# Altium PCB SENSEI_Base-Board_Clean.PcbDoc (part 6 of 7)
Units mm, origin at the board's own origin, x right, y up, seen from the top; angles counter-clockwise.
Board outline 25.2 x 15.15 mm, 8 copper layers (Top Sig/Pwr, GND1, Sig1, GND2, Sig2, Pwr, GND3, Bot Sig/Pwr), stack 1.53 mm thick; 187 components, 192 nets, 951 pads, 1831 vias.
Unrouted connection lines stored in the file: 214.
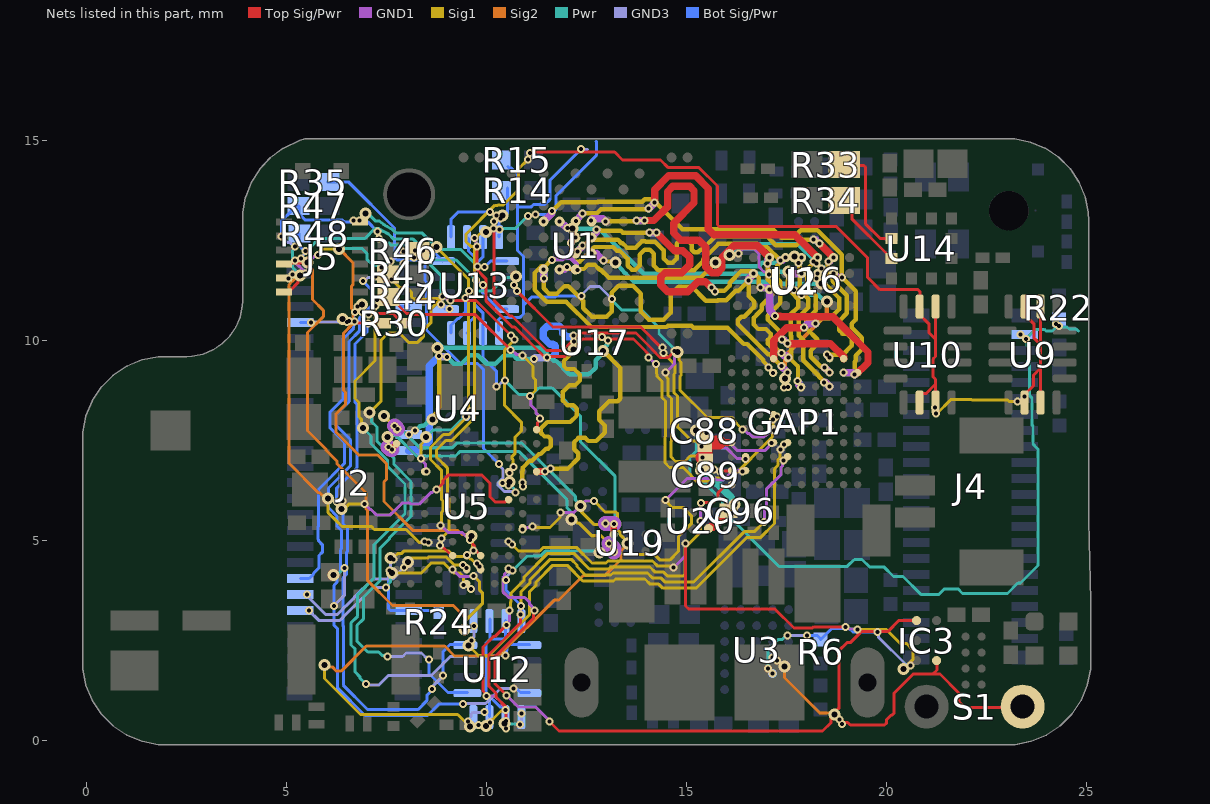
[diagram p11: the nets of this part, all layers, seen from the top]

## Via types
v1: diameter 0.2, hole 0.1, Top Sig/Pwr to GND1, 467 vias
v2: diameter 0.2, hole 0.1, GND3 to Bot Sig/Pwr, 431 vias
v3: diameter 0.2, hole 0.1, GND1 to Sig1, 369 vias
v4: diameter 0.3, hole 0.15, Sig1 to Pwr, 279 vias
v5: diameter 0.2, hole 0.1, Pwr to GND3, 270 vias
v6: diameter 0.3, hole 0.15, Top Sig/Pwr to Bot Sig/Pwr, tented both sides, 15 vias

## Nets (pads, with @x,y where several pads share a name; then routed paths per layer and width w, separated by ;. In a path a pad name is that pad's centre, name@x,y a point inside that pad or via, vN(x,y) a via of type N, cw(c..) or ccw(c..) an arc to the next point about the centre after c; other vN are vias at no path point) (continued)
nRF_QSPI_IO2: J2.16 U5.L9 U17.B2 | length 13.1
  Top Sig/Pwr w0.185: U5.L9@11.25,6.725 11.251,6.726 v1(11.456,6.727) v1(11.456,6.727)
  GND1 w0.111: v1(11.456,6.727) 11.48,6.727 11.536,6.784 11.581,6.784 v3(11.598,6.801)
  GND3 w0.111: v2(8.054,7.655) 8.078,7.655 8.159,7.736 8.187,7.736 v5(8.204,7.753) ; v2(12.881,10.094) 12.899,10.077 12.929,10.077 13.006,10 v5(13.03,10)
  Sig1 w0.111: v4(8.643,8.031) 8.643,8.082 8.767,8.206 8.767,8.267 8.819,8.32 8.819,9.717 8.771,9.766 v4(8.771,9.817) ; v3@11.604,6.801 12.034,6.801 12.294,7.061 12.294,7.185 12.193,7.287 12.193,7.463 12.296,7.567 12.467,7.567 12.544,7.49 12.744,7.49 12.953,7.699 12.953,7.877 12.815,8.016 12.815,8.237 13.06,8.483 13.28,8.483 13.343,8.545 13.343,9.314 v4(12.913,9.744)
  Pwr w0.111: v5(8.204,7.753) 8.229,7.753 8.334,7.858 8.359,7.858 8.367,7.866 8.428,7.866 8.592,8.031 v4(8.643,8.031) ; v4@8.758,9.825 10.555,9.825 10.561,9.819 11.351,9.819 11.681,9.489 11.739,9.489 12.069,9.159 12.552,9.159 12.573,9.18 12.582,9.18 12.725,9.323 12.725,9.505 12.913,9.693 v4(12.913,9.744) 12.913,9.795 13.013,9.895 13.013,9.983 v5(13.03,10)
  Bot Sig/Pwr w0.185: v2(8.054,7.655) 8.054,7.651 J2.16@8.055,7.65
nRF_QSPI_IO3: J2.15 U5.K8 U17.B4 | length 13.9
  GND1 w0.111: v1@10.901,6.377 10.903,6.379 v1@10.903,6.446 ; v1(10.915,6.349) 10.903,6.361 v1@10.903,6.446 ; v1@10.903,6.446 v3(10.892,6.458) v1@10.903,6.446
  GND3 w0.111: v2(12.172,10.123) 12.177,10.118 12.177,9.976 v5(12.182,9.971)
  GND3 w0.185: v2(8.815,9.618) 8.819,9.618 8.839,9.598 9.005,9.598 v5(9.008,9.595) ; v5(11.181,9.545) 11.185,9.545 11.211,9.57 11.509,9.57 v2(11.512,9.573)
  Sig1 w0.111: v3(10.892,6.458) 10.892,6.728 10.908,6.745 10.908,6.826 11.075,6.993 11.135,6.993 11.307,7.165 11.356,7.165 11.491,7.3 11.544,7.3 11.605,7.361 11.605,7.538 11.54,7.602 11.447,7.602 11.355,7.694 11.355,7.8 11.518,7.964 12.091,7.964 12.257,8.13 12.257,8.296 12.165,8.388 12.019,8.388 11.907,8.5 11.907,8.719 12.068,8.88 12.21,8.88 12.332,9.002 12.332,9.143 12.187,9.289 11.999,9.289 11.934,9.354 11.934,9.496 12.166,9.728 v4(12.166,9.779)
  Pwr w0.111: v5(9.008,9.595) 9.181,9.422 9.373,9.422 9.584,9.633 9.777,9.633 9.988,9.422 10.22,9.422 10.425,9.627 10.673,9.627 10.755,9.545 v5(11.181,9.545) ; v4@12.13,9.816 v4(12.166,9.779) 12.174,9.787 12.174,9.964 v5(12.182,9.971)
  Bot Sig/Pwr w0.185: J2.15@8.055,7.25 8.073,7.268 8.293,7.268 8.398,7.373 8.454,7.373 8.563,7.482 8.563,9.363 8.815,9.614 v2(8.815,9.618) ; v2(11.512,9.573) 11.515,9.576 11.635,9.576 11.72,9.661 11.72,9.861 11.7,9.88 ; 11.662,9.897 11.655,9.904 11.586,9.904 11.412,10.077 11.412,10.254 11.52,10.362 11.818,10.362 11.903,10.277 11.903,10.184 11.99,10.097 12.146,10.097 v2(12.172,10.123)
nRF_RAM_pwr_sel: U4.B2 U5.C9 | length 2.6
  Top Sig/Pwr w0.075: U5.C9@8.45,6.725 8.451,6.726 v1(8.493,6.726)
  GND1 w0.075: v3(8.362,7.053) 8.362,7.019 8.469,6.912 8.469,6.75 v1(8.493,6.726)
  GND3 w0.075: v2(9.487,8.103) 9.487,8.115 9.597,8.225 v5(9.597,8.236)
  Sig1 w0.075: v3(8.362,7.053) 8.362,7.404 8.483,7.525 v4(8.483,7.586)
  Pwr w0.075: v4(8.483,7.586) 8.49,7.586 8.672,7.769 9.13,7.769 v5(9.597,8.236)
OSPI_0: GAP1.J10 U1.H7 U2.D5 | length 11.8
  Top Sig/Pwr w0.185: v1(17.525,9.925) 18.597,9.925 18.925,9.597 GAP1.J10@18.925,9.55
  GND1 w0.185: v3(12.106,12.445) 12.109,12.448 12.109,12.468 12.219,12.578 v1(12.219,12.582) ; v3(17.342,12.008) 17.342,12.001 17.397,12.001 17.471,12.075 v1(17.475,12.075) ; v3(17.381,10.025) 17.384,10.022 17.424,10.022 17.521,9.925 v1(17.525,9.925)
  Sig1 w0.111: v3(12.106,12.445) 12.111,12.44 12.111,12.064 12.201,11.975 12.326,11.975 12.69,12.339 13.161,12.339 13.25,12.25 13.321,12.25 13.53,12.041 13.53,11.87 13.625,11.775 13.725,11.775 13.825,11.875 13.825,12.15 13.95,12.275 14.075,12.275 14.175,12.175 14.175,11.875 14.289,11.761 15.186,11.761 15.412,11.987 15.412,12.033 15.795,12.417 16.77,12.417 16.848,12.339 17.011,12.339 v3(17.342,12.008) ; v3@17.319,11.987 17.336,11.97 17.336,11.945 17.27,11.879 17.27,11.544 17.345,11.468 17.345,10.945 17.025,10.625 17.025,10.525 17.375,10.175 17.375,10.03 v3(17.381,10.025)
OSPI_1: GAP1.H8 U1.G5 U2.D4 | length 10.4
  GND1 w0.185: v1(11.825,11.775) 11.828,11.778 11.948,11.778 12.004,11.835 v3(12.008,11.835) ; v3(17.803,11.94) 17.806,11.943 17.806,12.002 17.875,12.071 v1(17.875,12.075) ; v3(18.433,8.957) 18.436,8.954 18.467,8.954 18.571,8.85 v1(18.575,8.85)
  Sig1 w0.111: v3(12.008,11.835) 12.033,11.835 12.078,11.789 12.433,11.789 12.543,11.9 12.699,11.9 12.829,11.77 12.857,11.77 13.052,11.575 15.35,11.575 v4(15.725,11.95) ; v4(17.7,12.104) 17.7,12.067 17.803,11.965 v3(17.803,11.94) 17.82,11.923 17.82,11.851 17.83,11.841 17.83,11.257 18.039,11.048 18.039,10.827 17.8,10.588 17.8,10.125 17.925,10 17.925,9.838 17.914,9.827 17.914,9.512 18.305,9.12 18.305,9.109 18.433,8.981 v3(18.433,8.957)
  Pwr w0.111: v4(15.725,11.95) 15.761,11.914 15.901,11.914 15.959,11.856 16.802,11.856 16.896,11.95 17.333,11.95 17.455,12.072 17.669,12.072 v4(17.7,12.104)
OSPI_2: GAP1.H9 U1.H8 U2.D3 | length 11.7
  Top Sig/Pwr w0.185: v1(14.2,13.45) 14.203,13.453 14.203,13.772 14.548,14.117 15.227,14.117 15.543,13.801 15.543,12.782 15.675,12.65 17.7,12.65 v1(18.275,12.075)
  GND1 w0.185: v1(12.233,12.984) v3(12.391,13.182) ; v3(14.05,13.3) v1(14.2,13.45) ; v3(18.175,11.975) v1(18.275,12.075) ; v3(18.45,9.325) 18.452,9.325 18.575,9.203 v1(18.576,9.203)
  Sig1 w0.111: v3(12.391,13.182) 12.757,13.182 12.859,13.284 14.034,13.284 v3(14.05,13.3) ; v3(18.175,11.975) 18.175,11.951 18.016,11.792 18.016,11.334 18.225,11.125 18.225,10.75 17.995,10.52 17.995,10.305 18.268,10.031 18.268,9.918 18.1,9.75 18.1,9.595 18.353,9.342 18.433,9.342 v3(18.45,9.325)
OSPI_3: GAP1.H10 U1.H6 U2.D2 | length 11.8
  Top Sig/Pwr w0.185: U1.H6@12.225,12.175 12.225,12.179 v1(12.271,12.225) ; v1(18.325,12.425) v1(18.675,12.075)
  GND1 w0.185: v1(12.271,12.225) 12.271,12.229 12.397,12.355 12.397,12.372 v3(12.4,12.375) ; v3(18.175,12.525) 18.178,12.522 18.224,12.522 18.321,12.425 v1(18.325,12.425) ; v3@18.506,9.643 18.506,9.641 18.572,9.574 v1(18.572,9.572) ; v3(18.55,11.975) 18.553,11.978 18.574,11.978 18.671,12.075 v1(18.675,12.075)
  Sig1 w0.111: v3(12.4,12.375) 12.424,12.375 12.574,12.525 13.275,12.525 13.364,12.436 13.398,12.436 13.508,12.325 13.725,12.325 13.879,12.479 13.97,12.479 13.98,12.47 14.21,12.47 14.425,12.255 14.425,12.05 14.525,11.95 14.65,11.95 14.75,12.05 14.75,12.425 14.85,12.525 15,12.525 15.125,12.4 15.125,12.271 15.19,12.207 15.282,12.207 15.35,12.275 15.387,12.275 15.715,12.603 17.01,12.603 17.229,12.384 17.744,12.384 17.886,12.525 v3(18.175,12.525) ; v3@18.506,9.643 18.511,9.648 18.902,9.648 19.124,9.87 19.124,10.054 19.003,10.175 18.895,10.175 18.81,10.26 18.81,10.485 19.005,10.68 19.005,11.133 18.655,11.482 18.655,11.541 18.533,11.663 18.533,11.958 v3(18.55,11.975)
  other v3: 18.505,9.65
OSPI_4: GAP1.E10 U1.J8 U2.D6 | length 11.6
  Top Sig/Pwr w0.185: v1(13.95,13) 13.953,13.003 14.178,13.003 14.525,13.35 14.525,13.727 14.656,13.857 15.078,13.857 15.186,13.749 15.186,13.444 14.679,12.937 14.679,12.691 14.86,12.51 15.305,12.51 15.475,12.34 15.475,11.842 15.625,11.692 15.778,11.692 15.886,11.801 15.886,12.085 16.176,12.375 16.775,12.375 v1(17.075,12.075)
  GND1 w0.185: v1(12.604,13.008) 12.608,13.008 12.643,13.042 12.904,13.042 12.971,12.975 v3(12.975,12.975) ; v3(13.75,13) v1(13.95,13) ; v3(17.026,11.926) 17.028,11.928 17.028,12.024 17.075,12.071 v1(17.075,12.075) ; v3(17.369,9.694) 17.373,9.694 17.443,9.625 17.495,9.625 17.542,9.578 v1(17.546,9.578)
  Sig1 w0.111: v3(12.975,12.975) 12.988,12.988 13.738,12.988 v3(13.75,13) ; v3(17.026,11.926) 17.025,11.526 17.16,11.391 17.16,11.166 16.875,10.881 16.875,10.77 16.791,10.686 16.791,10.682 16.675,10.566 16.675,10.401 16.787,10.29 16.985,10.29 17.1,10.175 17.1,10.083 17.033,10.016 17.033,9.925 17.111,9.846 17.193,9.846 17.345,9.694 v3(17.369,9.694)
OSPI_5: GAP1.E9 U1.F5 U2.C7 | length 11.7
  GND1 w0.185: v1(11.425,11.775) 11.427,11.773 11.427,11.552 v3(11.429,11.55) ; v3(16.55,11.5) 16.553,11.503 16.553,11.549 16.675,11.671 v1(16.675,11.675) ; v3(17.368,9.363) 17.368,9.36 17.525,9.203 v1(17.525,9.2)
  Sig1 w0.111: v3(11.429,11.55) 11.425,11.546 11.425,11.306 11.556,11.175 11.76,11.175 11.948,11.364 12.04,11.364 12.414,10.99 12.414,10.811 12.625,10.6 13,10.6 13.125,10.725 13.125,11.2 13.3,11.375 13.65,11.375 13.85,11.175 13.85,10.725 14.05,10.525 14.425,10.525 14.6,10.7 14.6,11.15 14.8,11.35 15.125,11.35 15.48,10.995 15.772,10.995 15.784,11.007 15.988,11.007 16.227,11.245 16.295,11.245 v3(16.55,11.5) ; v3@16.55,11.494 16.55,11.114 16.689,10.975 16.689,10.847 16.605,10.763 16.605,10.759 16.441,10.595 16.364,10.595 16.278,10.509 16.278,10.417 17.034,9.661 17.071,9.661 v3(17.368,9.363)
OSPI_6: GAP1.F8 U1.G8 U2.C4 | length 9.8
  GND1 w0.185: v1(11.825,12.975) v3(12.017,12.814) ; v3(17.586,11.573) 17.586,11.575 17.583,11.578 17.676,11.672 17.872,11.672 v1(17.875,11.675) ; v3(17.778,8.985) 17.778,8.981 17.8,8.959 17.8,8.891 17.856,8.835 v1(17.856,8.831)
  Sig1 w0.111: v3(12.017,12.814) v4(12.15,12.8) ; v4(17.55,11.725) 17.564,11.711 17.564,11.593 17.579,11.578 17.579,11.554 17.531,11.507 17.531,11.349 17.623,11.257 17.623,11.202 17.788,11.036 17.788,10.839 17.605,10.656 17.605,10.126 17.611,10.12 17.611,9.527 17.785,9.353 17.785,8.993 v3(17.778,8.985) ; v3@17.579,11.573 v3(17.586,11.573)
  Pwr w0.111: v4(12.15,12.8) 12.8,12.8 13.93,11.67 16.985,11.67 17.04,11.725 v4(17.55,11.725)
OSPI_7: GAP1.D10 U1.J6 U2.C3 | length 9.6
  Top Sig/Pwr w0.185: GAP1.D10@17.175,9.55 17.175,10 17.5,10.325 v1(17.932,10.325)
  GND1 w0.185: v1(12.625,12.175) 12.628,12.172 12.749,12.172 12.921,12 v3(12.925,12) ; v1(17.932,10.325) 17.937,10.325 18.032,10.421 18.222,10.421 v3(18.225,10.424) ; v3@18.248,11.55 v3(18.246,11.55) 18.246,11.554 18.272,11.58 18.272,11.672 v1(18.275,11.675)
  Sig1 w0.111: v3(12.925,12) v4(13.223,11.951) ; v3(18.225,10.424) 18.249,10.424 18.376,10.552 18.577,10.552 18.811,10.786 18.811,11.064 18.513,11.362 18.438,11.362 v4(18.375,11.425) 18.25,11.55 v3(18.246,11.55)
  Pwr w0.111: v4(13.223,11.951) 13.47,11.68 ccw(c13.552,11.755) 13.473,11.677 13.474,11.676 13.675,11.475 17.3,11.475 17.35,11.425 v4(18.375,11.425)
OSPI_CLK: GAP1.K9 U1.J7 U2.B6 | length 11.7
  Top Sig/Pwr w0.185: v1(14.248,12.698) 14.697,12.25 14.908,12.25 15.075,12.083 15.075,11.9 14.875,11.7 14.463,11.7 14.355,11.592 14.355,11.395 14.525,11.225 15.025,11.225 15.275,11.475 15.471,11.475 15.621,11.325 v1(15.625,11.325) ; v1(17.208,10.617) 17.211,10.614 17.336,10.614 17.358,10.593 18.657,10.593 19.535,9.715 19.535,9.442 19.383,9.29 19.365,9.29 GAP1.K9@19.275,9.2
  GND1 w0.185: v1(12.625,12.575) 12.625,12.579 12.747,12.701 12.747,12.772 v3(12.75,12.775) ; v3@14.076,12.699 v1(14.248,12.698) ; v1(15.625,11.325) 15.625,11.321 15.707,11.239 15.707,11.228 v3(15.71,11.225) ; v3(16.85,11.325) 16.853,11.322 17.024,11.322 17.071,11.275 v1(17.075,11.275) 17.075,10.754 17.208,10.621 v1(17.208,10.617)
  Sig1 w0.111: v3(12.75,12.775) 12.767,12.758 12.866,12.758 12.88,12.745 13.355,12.745 13.4,12.7 v3(14.075,12.7) ; v3(15.71,11.225) 15.727,11.242 15.942,11.242 16.075,11.375 16.075,11.445 16.36,11.73 16.645,11.73 16.8,11.576 16.8,11.399 16.85,11.349 v3(16.85,11.325)
OSPI_CS0: GAP1.D9 U1.H5 | length 8.8
  GND1 w0.107: v3(11.641,12.014) 11.659,12.032 11.882,12.032 11.886,12.035 11.899,12.035 11.927,12.063 12.103,12.063 12.255,11.911 12.255,11.777 v1(12.273,11.76) ; v3(17.05,9.331) 17.05,9.311 17.155,9.206 v1(17.155,9.186)
  Sig1 w0.107: v3(11.641,12.014) 11.616,12.014 11.458,11.856 11.365,11.856 11.2,11.691 11.2,11.271 11.503,10.968 11.992,10.968 12.618,10.341 14.501,10.341 14.534,10.374 15.12,10.374 15.173,10.321 16.022,10.321 16.427,9.916 16.516,9.916 16.922,9.51 16.922,9.478 17.05,9.35 v3(17.05,9.331)
OSPI_CS1: GAP1.E8 U16.1 | length 3.6
  Top Sig/Pwr w0.107: GAP1.E8@17.525,8.85 17.528,8.85 v1(17.532,8.845)
  GND1 w0.107: v3(17.435,8.824) 17.446,8.835 17.522,8.835 v1(17.532,8.845)
  Sig2 w0.107: v4@17.462,9.053 17.462,9.612 18.5,10.65 18.5,10.968 v4(18.505,10.973)
  GND3 w0.107: v2(17.682,11.265) 17.708,11.265 17.81,11.163 17.855,11.163 v5(17.872,11.145)
  Sig1 w0.107: v3(17.435,8.824) 17.447,8.836 17.447,9.039 v4(17.46,9.051)
  Pwr w0.107: v5(17.872,11.145) 18.281,11.145 18.453,10.973 v4(18.505,10.973)
OSPI_CS1_RAM: U2.C6 U16.4 | length 4.2
  Top Sig/Pwr w0.075: v1(17.058,11.652) 17.058,11.658 U2.C6@17.075,11.675
  GND1 w0.075: v3(16.3,12.175) 16.3,12.188 16.406,12.294 16.682,12.294 16.813,12.163 16.813,11.837 16.938,11.713 16.964,11.713 17.025,11.652 v1(17.058,11.652)
  GND3 w0.075: v5(18.246,11.929) 18.246,11.926 18.369,11.804 v2(18.369,11.801)
  Sig1 w0.075: v4(16.075,12.136) 16.094,12.156 16.281,12.156 v3(16.3,12.175)
  Pwr w0.075: v4(16.075,12.136) 16.302,12.363 16.51,12.363 16.546,12.399 16.643,12.399 16.667,12.423 17.752,12.423 18.225,11.95 v5@18.225,11.925
  Bot Sig/Pwr w0.075: v2(18.369,11.801) U16.4@18.382,11.785 U16.4@18.382,11.785
OSPI_DS: GAP1.J9 U1.F8 U2.C2 | length 12.3
  GND1 w0.185: v1(11.425,12.975) 11.425,12.979 11.633,13.188 11.633,13.236 v3(11.636,13.239) ; v1(18.675,11.675) 18.679,11.675 18.776,11.578 18.875,11.578 18.878,11.581 v3(18.882,11.581) v3@18.879,11.584 ; v1(18.925,9.2) 18.928,9.197 19.149,9.197 19.196,9.15 v3(19.2,9.15)
  Sig1 w0.111: v3(11.636,13.239) 11.639,13.239 11.862,13.462 12.774,13.462 12.782,13.47 13.891,13.47 13.952,13.53 14.145,13.53 14.888,12.788 17.152,12.788 17.371,12.57 17.668,12.57 17.853,12.755 18.27,12.755 18.882,12.144 v3(18.882,11.581) 19.225,11.238 19.225,10.525 19.125,10.425 19.125,10.325 19.375,10.075 19.375,9.775 19.225,9.625 19.225,9.5 19.2,9.475 v3(19.2,9.15)
PMIC_E\N\: IC3.C2 S1.2 U3.B3 | length 9.1
  Top Sig/Pwr w0.075: v1(18.817,0.531) 18.85,0.531 18.929,0.451 19.028,0.451 19.092,0.388 19.95,0.388 19.994,0.432 19.994,0.514 20.118,0.638 20.144,0.638 20.187,0.682 20.187,1.187 20.663,1.663 21.153,1.663 ; IC3.C2@21.257,2 21.257,1.766 21.153,1.663 ; S1.2@23.4,0.85 23.374,0.824 21.966,0.824 21.813,0.978 21.813,1.187 21.337,1.663 21.153,1.663
  GND1 w0.075: v1(18.817,0.531) 18.817,0.511 18.889,0.438 v3(18.889,0.418)
  Sig2 w0.075: v4(17.447,1.856) 17.447,1.568 18.328,0.688 18.658,0.688 v4(18.696,0.65)
  GND3 w0.075: v2(17.15,2.075) 17.17,2.075 17.246,1.999 v5(17.266,1.999)
  Sig1 w0.075: v4(18.696,0.65) 18.696,0.631 18.889,0.437 v3(18.889,0.418)
  Pwr w0.075: v5(17.266,1.999) 17.285,1.999 17.428,1.856 v4(17.447,1.856)
PMIC_I\R\Q\: R6.1 U3.B2 U5.J4 | length 18.7
  Top Sig/Pwr w0.075: v1(10.544,4.973) 10.548,4.973 U5.J4@10.55,4.975 ; v1(14.975,4.924) 14.975,3.365 15.05,3.289 17.207,3.289 17.683,2.813 18.15,2.813 18.18,2.844 v1(18.975,2.844)
  GND1 w0.075: v1(10.544,4.973) 10.556,4.973 v3(10.63,4.899) ; v3(14.674,4.323) 14.975,4.624 v1(14.975,4.924) ; v1(18.975,2.844) 19.009,2.844 19.057,2.796 19.251,2.796 v3(19.27,2.776)
  GND3 w0.075: v5(17.037,1.799) 17.037,1.794 17.15,1.681 v2(17.15,1.675) ; v5(17.528,2.632) 17.776,2.632 17.778,2.63 18.012,2.63 v2(18.015,2.627) ; v2(19.77,2.714) 19.794,2.69 19.794,2.591 20.485,1.9 20.572,1.9 v5(20.596,1.876)
  Sig1 w0.075: v3(10.63,4.899) 10.635,4.899 10.796,4.738 11.328,4.738 11.421,4.831 12.244,4.831 12.633,4.442 12.985,4.442 13.036,4.492 14.145,4.492 14.276,4.361 14.567,4.361 14.582,4.347 14.65,4.347 v3(14.674,4.323) ; v3(19.27,2.776) 19.992,2.776 20.342,2.426 20.501,2.426 20.654,2.273 20.654,2.02 v4(20.425,1.79)
  Pwr w0.075: v5(17.037,1.799) 17.037,2.272 17.286,2.521 17.383,2.521 17.494,2.632 v5(17.528,2.632) ; v4(20.425,1.79) 20.476,1.79 20.562,1.876 v5(20.596,1.876)
  Bot Sig/Pwr w0.075: v2(18.015,2.627) 18.268,2.627 R6.1@18.36,2.535 ; R6.1@18.35,2.525 R6.1@18.36,2.535 ; v2(19.77,2.714) 19.161,2.714 19.078,2.797 18.622,2.797 R6.1@18.36,2.535
QVAR1: R34.2 U14.12 | length 1.9
  Top Sig/Pwr w0.075: R34.2@18.94,13.435 19.13,13.245 19.13,13.045 20.011,12.164 20.011,12.151 20.113,12.049 U14.12@20.126,12.049
QVAR2: R33.2 U14.11 | length 2.8
  Top Sig/Pwr w0.075: R33.2@18.924,14.402 18.951,14.375 19.432,14.375 19.476,14.331 19.476,12.911 19.838,12.549 U14.11@20.126,12.549
R\S\T\: J2.5 R24.2 U5.G2 | length 5.2
  Top Sig/Pwr w0.075: v1(9.826,4.346) 9.826,4.299 U5.G2@9.85,4.275
  GND1 w0.075: v3(9.757,4.429) 9.757,4.415 v1(9.826,4.346)
  GND3 w0.075: v2(7.575,4.25) 7.599,4.274 7.599,4.415 7.675,4.491 v5(7.675,4.525)
  Sig1 w0.075: v4(7.597,4.558) 7.658,4.558 7.771,4.671 7.867,4.671 7.93,4.734 9.059,4.734 9.193,4.6 9.525,4.6 9.587,4.537 9.614,4.537 9.723,4.429 v3(9.757,4.429)
  Pwr w0.075: v4(7.597,4.558) 7.631,4.525 v5(7.675,4.525)
  Bot Sig/Pwr w0.075: v2(7.575,4.25) 7.551,4.226 7.551,4.134 7.55,3.299 7.594,3.255 8.012,3.255 J2.5@8.018,3.248 ; J2.5@8.055,3.25 R24.2@8.818,3.25
RESET_N: GAP1.D4 J4.1 R22.1 | length 21.7
  GND1 w0.075: v3(15.493,7.69) 15.493,7.659 15.683,7.468 16.052,7.468 16.272,7.248 16.951,7.248 17.128,7.426 v1(17.128,7.44)
  GND3 w0.075: v2(23.343,10.155) 23.373,10.155 v5(23.484,10.044) ; v2(24.234,10.42) 24.291,10.363 v5(24.307,10.363)
  Sig1 w0.075: v4(15.231,7.758) 15.292,7.758 15.346,7.703 15.48,7.703 v3(15.493,7.69)
  Pwr w0.075: v4(15.231,7.758) 15.231,7.226 15.091,7.087 15.091,6.638 15.245,6.484 15.405,6.484 15.901,5.988 15.901,5.762 17.307,4.356 19.018,4.356 19.192,4.529 19.384,4.529 19.57,4.343 19.932,4.343 20.175,4.1 20.41,4.1 20.854,3.656 21.308,3.656 21.445,3.793 21.786,3.793 21.899,3.68 23.02,3.68 23.281,3.941 23.35,3.941 23.786,4.377 23.786,5.009 ; v5(23.484,10.044) 23.508,10.02 23.508,9.86 23.567,9.801 23.567,8.637 23.63,8.574 23.63,7.893 23.665,7.858 23.665,7.408 23.787,7.286 23.787,5.009 ; v5@23.491,10.051 23.723,10.283 23.94,10.283 23.984,10.238 24.149,10.238 24.274,10.363 v5(24.307,10.363) 24.331,10.339 24.507,10.339 24.557,10.289 24.741,10.289 24.792,10.237
  Bot Sig/Pwr w0.075: v2(24.234,10.42) 24.305,10.491 R22.1@24.305,10.525
SHARED_GPIOs_SEL: U5.E3 U9.6 U9.7 U9.14 U9.15 U10.6 U10.7 U10.14 U10.15 | length 35.6
  Top Sig/Pwr w0.075: v1(8.841,4.878) 8.869,4.878 9.122,4.625 U5.E3@9.15,4.625 ; v1(11.082,14.693) 11.102,14.713 13.202,14.713 13.398,14.516 14.348,14.516 14.542,14.322 15.312,14.322 15.769,13.865 15.769,12.896 15.811,12.855 18.741,12.855 19.523,12.073 19.523,11.581 19.832,11.272 20.786,11.272 20.83,11.228 U10.15@20.83,10.855 ; U10.6@20.825,8.45 20.825,8.61 20.887,8.671 20.984,8.671 21.225,8.913 ; U10.15@20.825,10.85 20.825,10.65 21.054,10.421 21.054,10.203 21.225,10.032 ; v1(21.211,8.333) 21.225,8.347 U10.7@21.225,8.45 21.225,8.913 ; U10.14@21.225,10.827 21.225,10.032 ; v1(23.442,8.602) U9.6@23.45,8.602 ; U9.6@23.45,8.45 U9.6@23.45,8.602 ; U9.15@23.45,10.85 23.45,10.65 23.679,10.421 23.679,10.068 23.85,9.897 ; U9.7@23.85,8.5 23.85,9.313 ; U9.14@23.85,10.85 23.85,9.897 ; 21.225,8.913 21.225,9.031 21.156,9.1 21.156,9.531 21.225,9.601 21.225,10.032 ; U9.6@23.45,8.602 23.45,8.65 23.677,8.877 23.677,9.141 23.85,9.313 ; 23.85,9.313 23.85,9.897
  GND1 w0.075: v1(8.841,4.878) 8.855,4.893 8.855,5.043 v3(8.87,5.057) ; v3(11.029,14.523) 11.053,14.547 11.053,14.63 11.082,14.659 v1(11.082,14.693) ; v1(21.211,8.333) 21.226,8.318 21.226,8.193 v3(21.24,8.178) ; v3(23.275,8.475) 23.295,8.475 23.422,8.602 v1(23.442,8.602)
  Sig1 w0.075: v3(8.87,5.057) 9.061,5.249 9.061,6.051 9.028,6.085 9.028,6.808 8.748,7.088 8.748,7.267 8.98,7.5 9.126,7.5 9.696,8.07 9.696,12.311 9.652,12.355 9.603,12.355 9.485,12.474 9.485,12.661 10.206,13.382 10.276,13.382 10.283,13.389 10.419,13.389 10.794,13.764 10.794,14.288 v3(11.029,14.523) ; v3(21.24,8.178) 21.257,8.178 21.603,8.524 22.128,8.524 22.133,8.519 23.025,8.519 23.062,8.481 23.269,8.481 v3(23.275,8.475)
soft_R\S\T\: IC3.A1 U5.J2 | length 17.1
  Top Sig/Pwr w0.075: v1(10.5,1.131) v1(10.5,1.131) 10.211,1.42 10.211,2.092 11.176,3.058 11.176,3.226 v1(11.2,3.25) ; v1(10.55,4.3) U5.J2@10.537,4.287 ; v1(11.575,0.475) 11.812,0.238 18.4,0.238 18.604,0.442 18.604,0.619 18.783,0.797 18.807,0.797 ; 18.806,0.82 18.806,2.243 19.011,2.449 19.093,2.449 19.367,2.723 20.025,2.723 20.303,3 IC3.A1@20.75,3 ; U5.J2@10.537,4.287 U5.J2@10.55,4.275 U5.J2@10.537,4.287
  GND1 w0.075: v1(10.5,1.131) 10.791,0.84 11.229,0.84 11.575,0.494 v1(11.575,0.475) ; v1(10.55,4.3) 10.55,4.266 10.446,4.162 10.446,4.109 10.406,4.069 10.406,3.722 10.552,3.576 10.953,3.576 11.078,3.452 11.078,3.406 11.2,3.284 v1(11.2,3.25)
SPI_A_CLK: R44.2 U5.L12 U12.9 | length 22.1
  Top Sig/Pwr w0.075: v1(7.26,11.008) 7.468,11.008 R44.2@7.494,11.034 ; R44.2@7.555,11.122 7.999,10.677 8.167,10.677 8.198,10.647 9.719,10.647 v1(10.603,9.763) ; U5.L12@11.25,7.775 11.272,7.797 11.272,7.946 11.338,8.012 v1(11.338,8.046)
  GND1 w0.075: v3(7.226,10.862) 7.243,10.878 7.243,10.992 v1(7.26,11.008) ; v1(10.603,9.763) 10.636,9.763 10.751,9.649 10.878,9.649 v3(10.902,9.625) ; v3(11.089,8.618) 11.104,8.603 11.104,8.387 11.238,8.253 11.238,8.181 11.338,8.08 v1(11.338,8.046)
  GND3 w0.075: v5(6.984,1.409) 7.001,1.392 7.306,1.392 7.546,1.632 8.622,1.632 9.086,2.096 9.713,2.096 9.736,2.119 10.281,2.119 10.285,2.123 v2(10.475,2.125) v2(10.475,2.125)
  Sig1 w0.075: v4(6.91,7.815) 6.867,7.858 6.867,8.034 6.807,8.093 6.807,8.452 6.707,8.552 6.707,8.992 7.214,9.499 7.214,10.849 v3(7.226,10.862) ; v3(10.902,9.625) 11.163,9.364 11.163,9.084 11.222,9.024 11.222,8.754 11.089,8.621 v3(11.089,8.618)
  Pwr w0.075: v4(6.91,7.815) 6.91,7.812 7.108,7.614 7.108,7.454 7.115,7.447 7.115,7.416 7.527,7.004 7.527,6.85 7.96,6.417 7.96,5.674 7.185,4.898 7.185,4.056 6.777,3.649 6.777,3.108 6.612,2.944 6.612,2.39 6.715,2.288 6.715,1.714 6.83,1.599 6.83,1.567 6.984,1.413 v5(6.984,1.409)
  Bot Sig/Pwr w0.075: v2(10.475,2.125) 10.499,2.149 10.499,2.255 10.51,2.266 10.51,2.343 10.563,2.396 11.071,2.396 U12.9@11.075,2.4
SPI_A_CLK_GAP: GAP1.B2 U12.8 | length 10.3
  GND1 w0.075: v3(14.476,6.012) 15.009,6.547 15.709,6.547 15.743,6.513 15.919,6.513 16.158,6.751 16.223,6.751 16.224,6.749 16.376,6.749 v1(16.4,6.725)
  GND3 w0.075: v2(10.486,4.016) 10.51,4.04 10.51,4.108 v5(10.653,4.25)
  Sig1 w0.075: v4(12.818,4.704) 12.835,4.688 13.39,4.688 13.421,4.657 14.193,4.657 14.338,4.511 14.576,4.511 14.797,4.733 14.797,5.104 15.126,5.432 15.126,5.609 14.913,5.822 14.648,5.822 14.476,5.994 v3(14.476,6.012)
  Pwr w0.075: v5(10.653,4.25) 11.011,4.609 11.34,4.609 11.467,4.736 12.786,4.736 v4(12.818,4.704)
  Bot Sig/Pwr w0.075: v2(10.486,4.016) 10.486,3.756 10.875,3.367 U12.8@10.875,3 ; U12.8@10.867,2.789 U12.8@10.867,2.989
SPI_A_CS: J2.28 R30.2 U5.J7 U12.4 | length 22.8
  Top Sig/Pwr w0.075: v1(6.696,10.481) 6.729,10.481 6.767,10.444 7.403,10.444 R30.2@7.435,10.476 ; v1(8.75,6.275) 8.907,6.432 8.907,6.503 9.04,6.636 9.882,6.636 10.079,6.44 10.079,6.103 10.221,5.96 10.454,5.96 10.519,6.025 U5.J7@10.55,6.025
  GND1 w0.075: v3(6.565,10.494) 6.572,10.487 6.689,10.487 v1(6.696,10.481) ; v3(6.946,5.915) 6.951,5.915 7.088,5.778 7.112,5.778 7.254,5.636 7.58,5.636 7.628,5.684 7.634,5.684 7.888,5.938 8.081,5.938 8.106,5.913 8.162,5.913 8.165,5.91 8.315,5.91 8.6,6.196 8.637,6.196 8.716,6.275 v1(8.75,6.275)
  GND3 w0.075: v2(5.604,10.454) 5.617,10.468 6.501,10.468 6.525,10.444 7.024,10.444 v2(7.039,10.429) ; v2(6.257,5.959) 6.272,5.974 6.388,5.974 v5(6.403,5.989) ; v2(8.64,1.295) 8.664,1.319 8.664,1.373 v2(8.914,1.623)
  Sig1 w0.075: v4(6.372,5.786) 6.433,5.786 6.565,5.918 6.943,5.918 v3(6.946,5.915) ; v4(6.393,10.544) 6.42,10.518 6.508,10.518 6.518,10.508 6.518,10.494 v3(6.565,10.494)
  Pwr w0.075: v4(6.372,5.786) 6.388,5.802 6.388,5.974 v5(6.403,5.989) ; v5(6.51,10.459) 6.51,10.465 v5@6.475,10.5 ; v5@6.475,10.5 6.437,10.5 v4(6.393,10.544) 6.431,10.544 v5@6.475,10.5
  Bot Sig/Pwr w0.075: J2.28@5.345,10.45 5.349,10.454 v2(5.604,10.454) ; v2(7.039,10.429) 7.015,10.405 7.015,10.224 6.707,9.917 6.707,8.862 6.707,8.458 6.765,8.4 6.765,6.822 6.244,6.301 6.244,5.959 6.257,5.946 6.257,5.925 6.379,5.804 6.379,5.702 6.412,5.669 6.412,5.425 6.52,5.317 6.52,4.733 6.493,4.706 6.493,4.151 6.412,4.07 6.412,2.868 6.417,2.864 6.417,1.384 7.022,0.779 8.288,0.779 8.506,0.997 8.506,1.128 8.64,1.262 v2(8.64,1.295) ; v2(8.914,1.623) 8.914,2.228 9.085,2.4 U12.4@9.475,2.4
SPI_A_CS_GAP: GAP1.E4 U12.5 | length 12.6
  GND1 w0.075: v3(17.352,7.281) 17.352,7.296 17.437,7.381 v1(17.437,7.396)
  GND3 w0.075: v5(9.626,2.502) 9.626,2.536 9.681,2.591 v2(9.681,2.87)
  Sig1 w0.075: v4(9.541,2.38) 9.796,2.125 10.054,2.125 11.078,3.149 11.078,3.73 11.238,3.89 11.238,3.966 11.653,4.381 12.016,4.381 12.405,3.992 13.172,3.992 13.222,4.042 13.959,4.042 14.09,3.911 14.302,3.911 14.404,3.81 15.236,3.81 16.5,5.074 16.842,5.074 17.196,5.428 17.196,6.795 17.287,6.886 17.287,7.027 17.338,7.079 17.338,7.267 v3(17.352,7.281)
  Pwr w0.075: v4@9.532,2.389 v4(9.541,2.38) ; v4@9.532,2.458 9.582,2.458 v5(9.626,2.502)
SPI_A_MISO: R35.2 U5.J8 U12.12 | length 31.4
  GND1 w0.075: v3(10.394,6.435) 10.418,6.411 10.478,6.411 10.517,6.371 v1(10.551,6.371)
  GND3 w0.075: v2(6.187,3.37) 6.449,3.632 v5(6.449,4.318) ; v2(6.91,11.485) 6.944,11.485 7.035,11.576 7.203,11.576 v5(7.227,11.6) ; v5(7.925,11.925) 7.959,11.925 8.085,12.051 8.164,12.051 v2(8.187,12.075) ; v2(9.404,0.914) 9.42,0.93 9.978,0.93 10.348,1.3 v2(10.675,1.3) ; v2(10.31,6.914) 10.31,6.88 10.409,6.781 10.409,6.569 10.284,6.444 10.284,6.382 10.441,6.226 10.564,6.226 10.567,6.223 10.696,6.223 v5(10.72,6.199)
  Sig1 w0.075: v3(10.394,6.435) v3@10.412,6.453 ; v4@10.503,6.488 10.467,6.453 v3@10.412,6.453 ; v4(10.567,6.471) 10.549,6.453 v3@10.412,6.453
  Pwr w0.075: v4(6.17,4.139) 6.213,4.182 6.308,4.182 6.443,4.318 v5(6.449,4.318) ; v5(7.227,11.6) 7.6,11.6 v5(7.925,11.925) ; v4(10.567,6.471) 10.567,6.41 10.696,6.281 10.696,6.223 v5(10.72,6.199)
  Bot Sig/Pwr w0.075: R35.2@6.028,13.968 6.543,13.968 7.696,12.815 7.696,12.387 7.713,12.371 7.713,12.056 7.757,12.013 8.187,12.013 8.279,12.013 ; 6.557,8.924 6.557,8.471 6.24,8.154 6.24,7.878 6.6,7.518 6.6,6.869 6.045,6.314 6.045,5.825 6.262,5.607 6.262,5.358 6.37,5.251 6.37,4.795 6.343,4.768 6.343,4.213 6.262,4.132 6.262,3.957 6.187,3.882 v2(6.187,3.37) 6.187,2.881 6.267,2.801 6.267,1.32 6.958,0.629 8.521,0.629 8.806,0.914 v2(9.404,0.914) ; 6.557,8.924 6.557,9.979 6.826,10.248 6.826,10.57 7.118,10.862 7.118,11.276 v2(6.91,11.485) ; v2(8.187,12.075) 8.216,12.075 8.279,12.013 ; v2(10.31,6.914) 9.92,7.304 9.92,8.81 9.927,8.817 9.927,8.886 9.927,9.273 9.775,9.425 9.339,9.425 8.497,10.267 8.497,10.902 8.498,11.467 8.463,11.502 8.463,11.947 8.397,12.013 8.279,12.013 ; v2(10.675,1.3) 10.699,1.276 10.773,1.276 10.849,1.2 U12.12@11.075,1.2
SPI_A_MISO_GAP: GAP1.E3 U12.13 | length 14.1
  Top Sig/Pwr w0.075: v1(10.489,0.49) 10.489,0.833 10.234,1.088 10.234,1.183 10.061,1.356 10.061,2.155 10.844,2.937 10.844,3.144 v1(10.85,3.15) ; v1(17.422,6.997) GAP1.E3@17.525,7.1
  GND1 w0.075: v3@10.488,0.301 v1@10.488,0.489 ; v1(10.85,3.15) 10.858,3.158 10.858,3.356 v3(10.865,3.364) ; v3(16.931,5.463) 16.953,5.485 16.953,5.801 16.997,5.845 16.997,6.021 16.994,6.025 16.994,6.281 17.355,6.642 17.355,6.823 17.398,6.866 17.398,6.973 v1(17.422,6.997)
  GND3 w0.075: v5(10.837,0.407) 10.837,0.441 10.868,0.471 v2(10.868,0.682)
  Sig1 w0.075: v4(10.442,0.427) 10.438,0.422 10.438,0.35 v3(10.488,0.3) ; v3(10.865,3.364) 10.865,3.729 11.088,3.952 11.088,4.028 11.59,4.531 12.116,4.531 12.259,4.388 12.259,4.35 12.467,4.142 13.11,4.142 13.16,4.192 14.021,4.192 14.152,4.061 14.364,4.061 14.466,3.96 15.174,3.96 16.438,5.224 16.692,5.224 16.921,5.454 v3@16.921,5.456
  Pwr w0.075: v4(10.442,0.427) 10.452,0.417 10.827,0.417 v5(10.837,0.407)
  Bot Sig/Pwr w0.075: v2(10.868,0.682) 10.875,0.675 U12.13@10.875,0.6
SPI_A_MOSI: R45.2 U5.J9 U12.1 | length 22.5
  Top Sig/Pwr w0.075: v1(9.1,11) 9.732,11 v1(10.607,10.125) ; U5.J9@10.55,6.725 U5.J9@10.574,6.701 ; v1(10.568,6.694) U5.J9@10.574,6.701 ; U5.J9@10.572,6.725 10.574,6.722 U5.J9@10.574,6.701
  GND1 w0.075: v1(7.463,11.706) 7.463,11.7 7.624,11.538 v3(7.624,11.532) ; v3(8.9,11.101) 8.934,11.101 9.012,11.024 9.076,11.024 v1(9.1,11) ; v1(10.568,6.694) 10.568,6.712 10.678,6.822 v3(10.678,6.84) ; v1(10.607,10.125) 10.607,10.117 10.692,10.032 v3(10.692,10.023)
  GND3 w0.075: v5(7.525,2.103) 7.9,2.103 7.986,2.188 8.372,2.188 8.528,2.032 v2(8.561,2.032)
  Sig1 w0.075: v4(7.073,8.199) 7.364,8.489 7.364,10.016 7.536,10.188 7.814,10.188 8.045,9.957 8.277,9.957 8.419,10.099 8.419,10.259 8.604,10.444 8.604,10.785 v3@8.852,11.033 ; v3(7.624,11.532) 7.825,11.332 7.917,11.332 ; 7.917,11.332 7.999,11.332 8.123,11.208 8.123,11.097 8.186,11.034 8.277,11.034 8.282,11.029 8.499,11.029 8.524,11.053 8.852,11.053 v3(8.9,11.101) ; v3(10.678,6.84) 10.654,6.863 10.654,7.033 10.64,7.047 10.64,7.109 10.714,7.183 10.714,7.589 10.868,7.742 10.868,7.96 10.446,8.381 10.446,9.768 10.692,10.014 v3(10.692,10.023)
  Pwr w0.075: v4(7.073,8.199) 7.116,8.156 7.116,7.98 7.258,7.838 7.258,7.67 7.265,7.663 7.265,7.478 7.688,7.055 7.688,6.901 8.11,6.479 8.11,5.607 7.736,5.232 7.566,5.062 7.566,5.041 7.335,4.81 7.335,3.994 6.927,3.587 6.927,3.046 6.762,2.882 6.762,2.482 7.03,2.214 7.301,2.214 7.389,2.126 7.501,2.126 v5(7.525,2.103)
  Bot Sig/Pwr w0.075: v2(8.561,2.032) 8.561,1.674 9.036,1.2 U12.1@9.525,1.2
SPI_A_MOSI_GAP: GAP1.A1 U12.16 | length 12.8
  Top Sig/Pwr w0.075: v1(9.999,1.118) 9.999,1.151 9.911,1.239 9.911,2.339 10.168,2.597 10.202,2.597 v1(10.501,2.895) ; v1(15.354,5.939) 15.364,5.949 15.65,5.949 15.784,6.082 15.784,6.194 15.968,6.379 16.104,6.379 GAP1.A1@16.125,6.4
  GND1 w0.075: v1(9.999,1.118) 10,1.116 10.206,1.116 10.384,0.938 10.384,0.89 10.475,0.799 v3(10.475,0.765) ; v1(10.501,2.895) 10.501,2.929 10.577,3.005 v3(10.577,3.251) ; v3(15.342,5.489) 15.353,5.499 15.353,5.938 v1(15.354,5.939)
  GND3 w0.075: v2(9.792,0.391) 9.814,0.414 10.002,0.414 10.045,0.457 v5(10.078,0.457)
  Sig1 w0.075: v4(9.98,0.359) 10.362,0.741 10.451,0.741 v3(10.475,0.765) ; v3(10.577,3.251) 10.601,3.275 10.601,3.459 10.615,3.473 10.615,3.692 10.938,4.014 10.938,4.09 11.528,4.681 12.179,4.681 12.567,4.292 13.047,4.292 13.098,4.342 14.083,4.342 14.214,4.211 14.427,4.211 14.528,4.11 14.914,4.11 14.96,4.156 14.96,4.822 15.352,5.213 15.352,5.479 v3(15.342,5.489)
  Pwr w0.075: v4(9.98,0.359) v5(10.078,0.457)
SPI_B_CLK: J5.2 R46.2 U5.G3 U13.9 | length 14.7
  Top Sig/Pwr w0.075: v1(6.675,13) 6.711,12.964 J5.2@6.838,12.964 ; v1(8.215,12.253) 8.225,12.242 R46.2@8.293,12.242 ; v1(9.582,5.009) 9.582,4.975 9.701,4.857 9.701,4.774 U5.G3@9.85,4.625
  GND1 w0.075: v1@6.676,12.999 v3(6.82,12.998) ; v1(8.215,12.253) 8.217,12.25 8.407,12.25 v3(8.41,12.248) ; v3(8.848,5.372) 8.867,5.372 9.035,5.205 9.386,5.205 v1(9.582,5.009)
  GND3 w0.075: v5(9.776,11.856) 9.786,11.847 9.944,11.847 v2(9.953,11.837)
  Sig1 w0.075: v3(6.82,12.998) 6.82,13.011 6.976,13.168 v4(6.976,13.18) ; v3(8.41,12.248) 8.425,12.263 8.668,12.263 8.683,12.278 8.688,12.278 v4@8.745,12.278 ; v4(8.745,12.335) v4@8.745,12.278 ; v3(8.848,5.372) 8.872,5.396 8.872,5.705 8.911,5.744 8.911,5.989 8.878,6.022 8.878,6.746 8.598,7.026 8.598,7.329 8.918,7.65 9.064,7.65 9.546,8.133 9.546,11.533 8.802,12.278 v4@8.745,12.278
  Pwr w0.075: v4(6.976,13.18) 7.026,13.18 7.214,12.993 7.308,12.993 ccw(c8.048,13.825) 7.633,12.792 7.644,12.782 7.74,12.686 8.394,12.686 v4(8.745,12.335) 8.745,12.278 9.355,12.278 v5(9.776,11.856)
  Bot Sig/Pwr w0.075: v2(9.953,11.837) 9.953,11.84 10.098,11.984 U13.9@10.51,11.984
SPI_B_CLK_GAP: GAP1.D6 R14.1 U13.8 | length 19.6
  Top Sig/Pwr w0.075: v1(9.758,12.353) 9.758,11.769 9.98,11.547 9.98,10.997 10.639,10.338 10.701,10.338 11.434,9.605 11.961,9.605 12.394,10.037 13.585,10.037 13.674,10.037 13.986,9.725 13.986,9.719 14.017,9.687 14.017,9.599 v1(14.041,9.575) ; GAP1.D6@17.175,8.15 17.217,8.15 v1(17.261,8.106)
  GND1 w0.075: v3(9.697,12.567) 9.697,12.534 9.734,12.496 9.734,12.377 v1(9.758,12.353) ; v1(14.041,9.575) 14.056,9.575 14.213,9.418 v3(14.229,9.418) ; v3(17.164,8.031) 17.175,8.031 17.25,8.106 v1(17.261,8.106)
  GND3 w0.075: v5(10.176,12.797) 10.185,12.788 10.311,12.788 v2(10.32,12.778) ; v5(11.03,13.117) 11.046,13.132 11.205,13.132 v2(11.22,13.147)
  Sig1 w0.075: v3(9.697,12.567) 9.725,12.567 9.834,12.676 9.941,12.676 v4(9.984,12.719) ; v3(14.229,9.418) 14.253,9.394 14.253,9.172 14.261,9.164 14.261,9.108 14.382,8.987 14.382,8.579 14.472,8.489 14.472,7.601 14.46,7.589 14.46,6.942 14.573,6.829 14.914,6.829 15.124,6.619 15.124,6.605 15.245,6.484 15.512,6.484 15.587,6.56 16.113,6.56 17.129,7.575 17.146,7.615 v3(17.164,8.031)
  Pwr w0.075: v4(9.984,12.719) 10.045,12.719 10.099,12.773 10.152,12.773 v5(10.176,12.797) 10.71,12.797 v5(11.03,13.117)
  Bot Sig/Pwr w0.075: U13.8@10.305,12.584 U13.8@10.305,12.655 ; v2(10.32,12.778) 10.32,12.765 U13.8@10.305,12.75 ; U13.8@10.324,12.655 10.324,12.731 U13.8@10.305,12.75 ; R14.1@10.524,13.81 10.524,13.183 10.305,12.964 U13.8@10.305,12.75 ; v2(11.22,13.147) 11.605,13.147 11.729,13.271 11.729,13.613 12.728,14.612 12.75,14.634 12.75,14.696 12.744,14.949 12.744,14.971 12.737,14.977
SPI_B_CS: J2.24 J5.7 U5.F3 U13.4 | length 17.2
  Top Sig/Pwr w0.075: J5.7@4.818,11.936 5.368,11.936 5.4,11.967 5.523,11.967 v1(5.547,11.991) ; U5.F3@9.5,4.625 9.504,4.629 9.504,4.632 v1(9.516,4.643)
  GND1 w0.075: v1(5.547,11.991) 5.581,11.991 5.706,12.116 5.765,12.116 v3(5.789,12.14) ; v1(9.516,4.643) 9.542,4.643 9.649,4.75 v3(9.675,4.75)
  Sig2 w0.075: v4(6.315,12.294) 6.656,11.953 6.656,11.394 6.623,11.361 6.623,10.797 6.656,10.764 6.656,10.422 6.42,10.186 6.42,8.756 6.476,8.7 6.476,8.407 6.24,8.171 6.24,7.703 6.801,7.142 7.277,7.142 7.502,6.917 7.502,6.537 7.434,6.469 7.434,5.977 8.163,5.249 9.286,5.249 9.383,5.153 9.578,5.153 v4(9.622,5.11)
  GND3 w0.075: v2(7.375,11.832) 7.399,11.856 7.452,11.856 7.564,11.967 v5@7.603,11.967 ; v5(7.603,11.973) 7.831,12.201 7.902,12.201 v2(7.926,12.225)
  Sig1 w0.075: v3(5.789,12.14) 5.813,12.164 5.813,12.222 5.885,12.294 v4(6.315,12.294) ; v4(9.622,5.11) 9.622,5.06 9.651,5.03 9.651,4.774 v3(9.675,4.75)
  Pwr w0.075: v4(6.315,12.294) 6.328,12.308 6.879,12.308 7.005,12.181 7.005,12.03 7.159,11.876 7.472,11.876 7.569,11.973 v5(7.603,11.973)
  Bot Sig/Pwr w0.075: v2(7.375,11.832) 7.375,11.798 7.437,11.736 7.437,11.373 7.529,11.282 7.529,11.156 7.835,10.85 J2.24@8.055,10.85 ; v2(7.926,12.225) 7.949,12.249 8.061,12.249 8.099,12.288 8.603,12.288 U13.4@8.902,11.988
SPI_B_CS_GAP: GAP1.A2 U13.5 | length 14.4
  Top Sig/Pwr w0.075: v1(10.19,12.972) 10.19,10.998 10.575,10.613 10.637,10.613 11.496,9.755 11.899,9.755 12.332,10.187 13.647,10.187 13.736,10.187 14.136,9.787 14.136,9.781 14.337,9.58 14.539,9.58 v1(14.696,9.737) ; v1(15.831,6.725) 15.844,6.738 16.113,6.738 GAP1.A2@16.125,6.75
  GND1 w0.075: v1(10.19,12.972) 10.214,12.996 10.214,13.056 10.25,13.092 v3(10.25,13.126) ; v3(14.473,9.196) 14.696,9.42 v1(14.696,9.737) ; v3(15.682,6.772) 15.706,6.749 15.808,6.749 v1(15.831,6.725)
  GND3 w0.075: v2(10.082,13.208) 10.116,13.208 10.248,13.076 10.325,13.076 v5(10.349,13.052)
  Sig1 w0.075: v3(10.25,13.126) v4(10.391,13.126) ; v3(14.473,9.196) 14.497,9.172 14.497,9.084 14.532,9.049 14.532,8.641 14.622,8.551 14.622,7.491 14.61,7.479 14.61,7.092 14.723,6.979 14.959,6.979 15.093,7.113 15.421,7.113 15.537,6.996 15.537,6.966 15.55,6.954 15.55,6.939 15.682,6.806 v3(15.682,6.772)
  Pwr w0.075: v5(10.349,13.052) 10.391,13.095 v4(10.391,13.126)
  Bot Sig/Pwr w0.075: U13.5@9.105,12.584 9.105,13.03 9.283,13.208 v2(10.082,13.208)
SPI_B_MISO: J5.11 R48.2 U5.E2 U13.12 | length 23.3
  Top Sig/Pwr w0.075: J5.11@4.818,11.236 5.07,11.236 5.289,11.455 5.289,11.503 5.457,11.671 v1(5.475,11.671) ; v1(9.152,4.276) v1(9.152,4.276)
  GND1 w0.075: v3(5.205,11.998) 5.205,11.97 5.475,11.7 v1(5.475,11.671) ; v1(9.152,4.276) 9.326,4.102 9.663,4.102 v3(9.675,4.114)
  Sig2 w0.075: v4(5.525,11.95) 5.525,11.889 5.647,11.767 5.647,11.201 5.648,11.2 5.648,11.027 5.917,10.758 5.917,10.597 5.523,10.203 5.523,7.748 5.988,7.284 5.988,7.256 6.254,6.99 6.254,6.926 6.984,6.195 6.984,5.791 7.026,5.749 7.026,3.998 7.648,3.376 9.169,3.376 9.473,3.072 9.473,2.8 v4(9.445,2.772)
  GND3 w0.075: v5(5.364,12.05) 5.364,12.084 5.444,12.164 5.444,12.221 v2(5.468,12.245) ; v5(9.739,11.517) 9.762,11.517 9.884,11.394 v2(9.907,11.394)
  Sig1 w0.075: v3(5.205,11.998) 5.228,11.974 5.501,11.974 v4(5.525,11.95) ; v4(9.445,2.772) 9.453,2.78 9.453,2.985 9.901,3.432 9.901,3.684 9.826,3.759 9.826,3.963 v3(9.675,4.114)
  Pwr w0.075: v5(5.364,12.05) 5.395,12.05 5.495,11.95 v4(5.525,11.95) 5.577,12.002 5.577,12.316 5.817,12.557 6.964,12.557 7.207,12.8 7.31,12.8 ccw(c8.048,13.825) 7.548,12.665 7.678,12.536 8.165,12.536 8.294,12.407 8.685,12.015 9.24,12.015 v5(9.739,11.517)
  Bot Sig/Pwr w0.075: R48.2@5.308,12.674 5.308,12.379 5.441,12.245 v2(5.468,12.245) ; v2(9.907,11.394) 9.893,11.38 9.893,11.201 10.31,10.784 U13.12@10.51,10.784
SPI_B_MISO_GAP: GAP1.D5 R15.1 U13.13 | length 16.2
  GND1 w0.075: v3(16.4,7.774) 16.434,7.774 16.534,7.673 16.574,7.673 16.652,7.595 16.94,7.595 v1(17.179,7.756)
  GND3 w0.075: v2(12.363,14.784) 12.367,14.78 12.52,14.78 12.525,14.775 ; v2(12.37,11.117) 12.37,11.137 12.586,11.352 12.824,11.352 v5(13.134,11.042)
  Sig1 w0.075: v4(14.766,9.714) 14.809,9.671 14.809,9.512 14.863,9.459 14.863,9.125 14.832,9.094 14.832,8.765 15.52,8.077 16.108,8.077 cw(c16.108,8.002) 16.171,8.043 16.226,7.958 ccw(c16.446,8.101) 16.259,7.917 v3(16.4,7.774)
  Pwr w0.075: v5(13.134,11.042) 13.134,11.008 13.222,10.92 ; 13.222,10.919 13.376,10.766 13.565,10.766 13.568,10.769 13.863,10.769 14.315,10.317 14.315,10.166 v4(14.766,9.714)
  Bot Sig/Pwr w0.075: U13.13@10.298,10.256 10.298,10.525 10.346,10.572 10.827,10.572 10.923,10.667 10.923,10.884 ; R15.1@10.532,14.347 10.564,14.315 10.623,14.315 10.773,14.165 10.773,13.343 ; v2(12.363,14.784) 11.579,14.001 11.579,13.523 11.458,13.402 11.175,13.402 11.116,13.343 10.773,13.343 ; v2@12.367,11.128 12.357,11.117 11.746,11.117 11.716,11.087 11.126,11.087 10.923,10.884 ; 10.773,13.343 10.773,12.252 10.923,12.102 10.923,10.884
SPI_B_MOSI: J5.9 R47.1 U5.C4 U13.1 | length 17.7
  Top Sig/Pwr w0.075: v1(8.441,4.979) 8.446,4.975 U5.C4@8.45,4.975
  GND1 w0.075: v1(5.044,11.555) 5.05,11.555 5.145,11.65 v3(5.151,11.65) ; v1(8.441,4.979) 8.51,4.979 v3(8.543,4.946)
  Sig2 w0.075: v4(5.338,11.625) 5.289,11.625 5.14,11.476 5.136,11.476 5.065,11.404 5.065,6.925 5.804,6.186 5.844,6.186 5.975,6.054 v4(6.036,6.054)
  GND3 w0.075: v2(4.875,12.606) 4.875,12.6 5.022,12.453 5.078,12.453 5.18,12.35 v5(5.214,12.35) ; v2(7.273,12.722) 7.291,12.704 7.291,12.566 v5(7.309,12.548) ; v5(8.854,10.907) 8.878,10.883 8.944,10.883 9.033,10.794 v2(9.067,10.794)
  Sig1 w0.075: v3(5.151,11.65) 5.164,11.638 5.325,11.638 v4(5.338,11.625) ; v4(6.036,6.054) 6.036,5.699 6.253,5.482 6.383,5.352 7.028,5.352 7.034,5.346 7.127,5.346 7.194,5.28 7.989,5.28 8.322,4.946 v3(8.543,4.946)
  Pwr w0.075: v5(5.214,12.35) 5.214,12.317 5.152,12.254 5.152,11.823 5.338,11.637 v4(5.338,11.625) ; v5(7.309,12.548) 7.343,12.548 7.448,12.443 7.558,12.443 7.615,12.386 8.103,12.386 8.324,12.164 8.854,11.635 v5(8.854,10.907)
  Bot Sig/Pwr w0.075: v2(4.875,12.606) 4.875,12.991 5.128,13.244 5.128,13.359 R47.1@5.293,13.359 ; R47.1@5.308,13.359 5.308,13.175 5.471,13.011 6.397,13.011 6.44,12.968 7.027,12.968 v2(7.273,12.722) ; U13.1@8.96,10.784 9.058,10.784 v2(9.067,10.794)
SPI_B_MOSI_GAP: GAP1.B3 U13.16 | length 11.4
  Top Sig/Pwr w0.075: v1(10.754,11.246) 11.663,10.337 13.709,10.337 13.851,10.337 14.367,9.822 v1(14.396,9.822)
  GND1 w0.075: v3(10.69,11.388) 10.714,11.364 10.714,11.32 10.754,11.28 v1(10.754,11.246) ; v1(14.396,9.822) 14.411,9.806 14.411,9.702 v3(14.426,9.687) ; v3(15.376,7.346) 15.393,7.329 15.53,7.329 15.541,7.318 15.99,7.318 16.258,7.05 16.456,7.05 v1(16.471,7.036)
  GND3 w0.075: v2(9.468,11.063) 9.492,11.087 9.492,11.138 9.558,11.204 v5(9.558,11.238)
  Sig1 w0.075: v3(10.69,11.388) 10.714,11.412 10.714,11.541 v4@10.771,11.598 ; v3(14.426,9.687) 14.426,9.683 14.713,9.397 14.713,9.187 14.682,9.156 14.682,8.703 14.772,8.613 14.772,7.845 15.122,7.495 15.225,7.495 15.374,7.346 v3(15.376,7.346)
  Pwr w0.075: v5(9.558,11.238) 10.126,11.238 10.465,11.577 10.719,11.577 v4(10.74,11.598)
  Bot Sig/Pwr w0.075: U13.16@9.11,10.184 9.11,10.384 9.279,10.553 9.309,10.553 9.476,10.721 v2@9.476,11.064
SPI_GAP_SEL: U5.K5 U12.6 U12.7 U12.14 U12.15 U13.6 U13.7 U13.14 U13.15 | length 34.5
  Top Sig/Pwr w0.075: v1(10.9,5.275) U5.K5@10.9,5.325 v1(10.9,5.275)
  GND1 w0.075: v1(10.9,5.275) 10.924,5.299 10.987,5.299 11.01,5.322 11.127,5.322 v3(11.151,5.346) ; v3(11.852,5.707) 12.187,5.707 12.469,5.989 v3(12.688,5.989)
  Sig2 w0.075: v4(5.95,1.886) 5.993,1.843 6.143,1.843 6.249,1.736 6.366,1.736 6.992,2.363 8.952,2.363 9.197,2.117 10.3,2.117 11.692,3.509 11.796,3.509 12.409,4.123 12.956,4.123 13.358,4.525 13.358,4.745 13.52,4.906 v4(13.52,4.93)
  GND3 w0.075: v5(9.53,0.477) 9.53,0.511 9.607,0.588 9.607,0.659 9.655,0.706 9.931,0.706 v2(9.942,0.717) ; v2(10.25,8.849) 10.274,8.849 10.43,9.006 v5(10.454,9.006)
  Sig1 w0.075: v4(5.95,1.886) 5.95,1.55 6.845,0.655 9.277,0.655 v4(9.582,0.35) ; v3(11.151,5.346) 11.169,5.328 11.584,5.328 11.832,5.576 11.832,5.687 v3(11.852,5.707) ; v3(12.688,5.989) 12.962,5.715 13.233,5.715 13.277,5.671 13.277,5.262 13.34,5.199 13.34,5.146 13.52,4.967 v4(13.52,4.93)
  Pwr w0.075: v5(9.53,0.477) 9.53,0.401 v4(9.582,0.35) ; v5(10.454,9.006) 10.806,8.653 11.14,8.653 11.306,8.819 11.64,8.819 12.343,8.116 12.343,7.478 13.216,6.606 13.216,5.324 13.34,5.199 13.34,5.146 13.52,4.967 v4(13.52,4.93)
  Bot Sig/Pwr w0.075: U13.15@9.51,10.184 9.565,10.239 9.565,10.462 9.695,10.592 9.695,10.908 ; U13.6@9.51,12.584 9.547,12.547 9.547,12.242 9.695,12.094 9.695,11.879 ; U13.14@9.905,10.184 9.905,10.698 9.695,10.908 ; U13.7@9.905,12.584 9.905,12.089 9.695,11.879 ; U13.14@9.91,10.184 9.912,10.182 9.912,9.572 10.25,9.234 v2(10.25,8.849) ; v2(9.942,0.717) 10.005,0.717 U12.15@10.075,0.647 ; U12.15@10.075,0.6 10.075,1.105 ; 10.08,2.519 U12.6@10.08,3.045 ; 10.282,2.544 10.431,2.544 10.475,2.587 U12.7@10.475,3 ; 10.281,2.544 10.105,2.544 9.981,2.42 9.981,1.199 10.075,1.105 ; U12.14@10.475,0.6 10.475,0.774 10.405,0.844 10.332,0.844 10.2,0.976 10.2,0.979 10.075,1.105 ; 9.695,10.908 9.695,11.879
SWDCLK: J2.45 U5.F2 | length 5
  Top Sig/Pwr w0.075: v1(9.492,4.319) 9.492,4.283 U5.F2@9.5,4.275
  GND1 w0.075: v3(9.415,4.387) 9.425,4.387 v1(9.492,4.319)
  GND3 w0.075: v2(5.515,3.648) 5.515,3.614 5.973,3.156 6.274,3.156 6.691,3.573 6.691,3.584 7.145,4.037 7.641,4.037 7.663,4.037 7.787,4.162 7.787,4.184 v5(7.932,4.328)
  Sig1 w0.075: v4(8.037,4.469) 8.126,4.558 8.519,4.558 8.545,4.584 8.997,4.584 9.194,4.387 v3(9.415,4.387)
  Pwr w0.075: v5(7.932,4.328) 7.932,4.346 8.037,4.451 v4(8.037,4.469)
SWDIO: J2.46 U5.F1 | length 5.5
  Top Sig/Pwr w0.075: v1(9.425,3.889) 9.464,3.889 U5.F1@9.5,3.925
  GND1 w0.075: v1@9.425,3.875 9.435,3.865 9.503,3.865 9.58,3.789 v3(9.614,3.789)
  GND3 w0.075: v2(5.555,3.254) 5.802,3.006 6.336,3.006 6.962,3.632 6.962,3.634 7.155,3.827 7.487,3.827 v5(7.489,3.825)
  Sig1 w0.075: v4(7.64,4.185) 8.358,4.185 8.607,4.434 8.935,4.434 9.185,4.183 9.333,4.183 9.428,4.089 9.428,3.974 v3(9.614,3.789)
  Pwr w0.075: v5(7.489,3.825) 7.489,3.859 7.597,3.967 7.597,4.142 v4(7.64,4.185)
  Bot Sig/Pwr w0.075: v2(5.555,3.254) J2.46@5.555,3.26
SWO: J2.44 R30.1 | length 9.8
  Top Sig/Pwr w0.075: v1(7.043,10.656) 7.065,10.677 7.658,10.677 7.724,10.612 7.724,10.607 7.898,10.434 R30.1@7.943,10.434
  GND1 w0.075: v3(6.882,10.711) 6.916,10.711 6.947,10.68 7.019,10.68 v1(7.043,10.656)
  GND3 w0.075: v2@6.752,10.797 6.728,10.772 6.728,10.724 v5(6.714,10.709) 6.714,10.743 6.751,10.781 6.751,10.826 v2(6.775,10.85)
  Sig1 w0.075: v3(6.882,10.711) 6.884,10.712 6.884,10.904 v4(6.886,10.905)
  Pwr w0.075: v5(6.714,10.709) 6.714,10.721 6.886,10.893 v4(6.886,10.905)
  Bot Sig/Pwr w0.075: J2.44@5.345,4.05 5.565,4.05 5.675,4.16 5.675,4.18 5.812,4.318 5.812,4.625 5.893,4.706 5.893,4.896 5.795,4.994 5.795,5.03 5.78,5.046 5.78,5.085 5.788,5.093 5.788,5.346 5.795,5.354 5.795,6.276 6.45,6.931 6.45,7.456 6.09,7.816 6.09,8.216 6.407,8.534 6.407,8.986 6.407,10.041 6.676,10.31 6.676,10.717 6.775,10.816 v2(6.775,10.85)
USB_N: U5.A11 U19.C2 | length 7.9
  Top Sig/Pwr w0.156: v1(7.632,7.275) 7.64,7.283 7.64,7.306 7.75,7.416 U5.A11@7.75,7.425 ; U19.C2@13.175,4.75 13.175,4.719 v1(13.181,4.714)
  GND1 w0.381: v3(7.541,7.336) 7.603,7.275 v1(7.632,7.275) ; v3(13.058,4.924) 13.181,4.801 v1(13.181,4.714)
  Sig1 w0.079: v4(7.528,7.59) 7.535,7.583 7.535,7.343 v3(7.541,7.336) ; v4(12.122,5.525) 12.181,5.525 12.265,5.441 12.308,5.441 12.628,5.121 12.861,5.121 v3(13.058,4.924)
  Pwr w0.079: v4(7.528,7.59) 7.561,7.624 7.738,7.624 8.247,7.115 9.223,7.115 9.338,7.23 10.8,7.23 12.011,6.018 12.011,5.815 12.08,5.747 12.08,5.567 v4(12.122,5.525)
USB_P: U5.A12 U19.C1 | length 7.9
  Top Sig/Pwr w0.156: U5.A12@7.75,7.775 7.762,7.787 v1(7.774,7.787) ; U19.C1@13.175,5.15 13.178,5.153 13.178,5.414 v1(13.181,5.417)
  GND1 w0.381: v3(7.698,7.867) 7.774,7.79 v1(7.774,7.787) ; v3(12.971,5.425) 13.173,5.425 v1(13.181,5.417)
  Sig1 w0.079: v4(7.438,8.111) 7.446,8.111 7.689,7.868 v3@7.689,7.865 ; v4(12.341,5.86) 12.38,5.821 12.38,5.707 12.682,5.405 12.951,5.405 v3(12.971,5.425)
  Pwr w0.079: v4(7.438,8.111) 7.441,8.111 7.632,7.92 7.734,7.92 8.332,7.321 9.137,7.321 9.252,7.436 10.885,7.436 12.218,6.104 12.218,6.017 12.341,5.894 v4(12.341,5.86)
V0p65_CSI2: C88.1 C89.1 C96.1 GAP1.A4 U20.A1 | length 4
  Top Sig/Pwr w0.18: 15.809,7.45 GAP1.A4@16.125,7.45
  Top Sig/Pwr w0.2: U20.A1@15.55,5.3 15.557,5.3 15.591,5.334 15.662,5.334 15.923,5.595 15.923,5.669 16.004,5.75 C96.1@16.05,5.75 v1(16.125,5.675)
  Top Sig/Pwr w0.3: C88.1@15.475,7.5 15.475,7.481 C88.1@15.506,7.45
  Top Sig/Pwr w0.35: v1(15.397,7.072) 15.469,7.144 15.469,7.487 C88.1@15.475,7.493 ; C88.1@15.506,7.45 15.809,7.45
  GND1 w0.2: v3(15.337,6.895) 15.397,6.955 v1(15.397,7.072) ; v3(15.975,5.75) 16.05,5.675 v1(16.125,5.675)
  Sig1 w0.2: v3(15.337,6.895) 15.337,6.763 v4(15.353,6.747) ; v3(15.975,5.75) 16.015,5.75 16.167,5.902 v4(16.195,5.902)
  Pwr w0.2: v4(15.353,6.747) 15.373,6.728 15.462,6.728 16.114,6.076 16.114,6.01 16.195,5.929 v4(16.195,5.902)